# Altium PCB EVB_CBDM_AK376xE_V1.0.1.PcbDoc (part 2 of 2)
Units mil, origin at the board's own origin, x right, y up, seen from the top; angles counter-clockwise.
Board outline 1970 x 2130.01 mil, 4 copper layers (Top, Inner Layer 2, Inner Layer 3, Bottom), stack 35.4 mil thick; 161 components, 161 nets, 664 pads, 636 vias.
Unrouted connection lines stored in the file: 412.
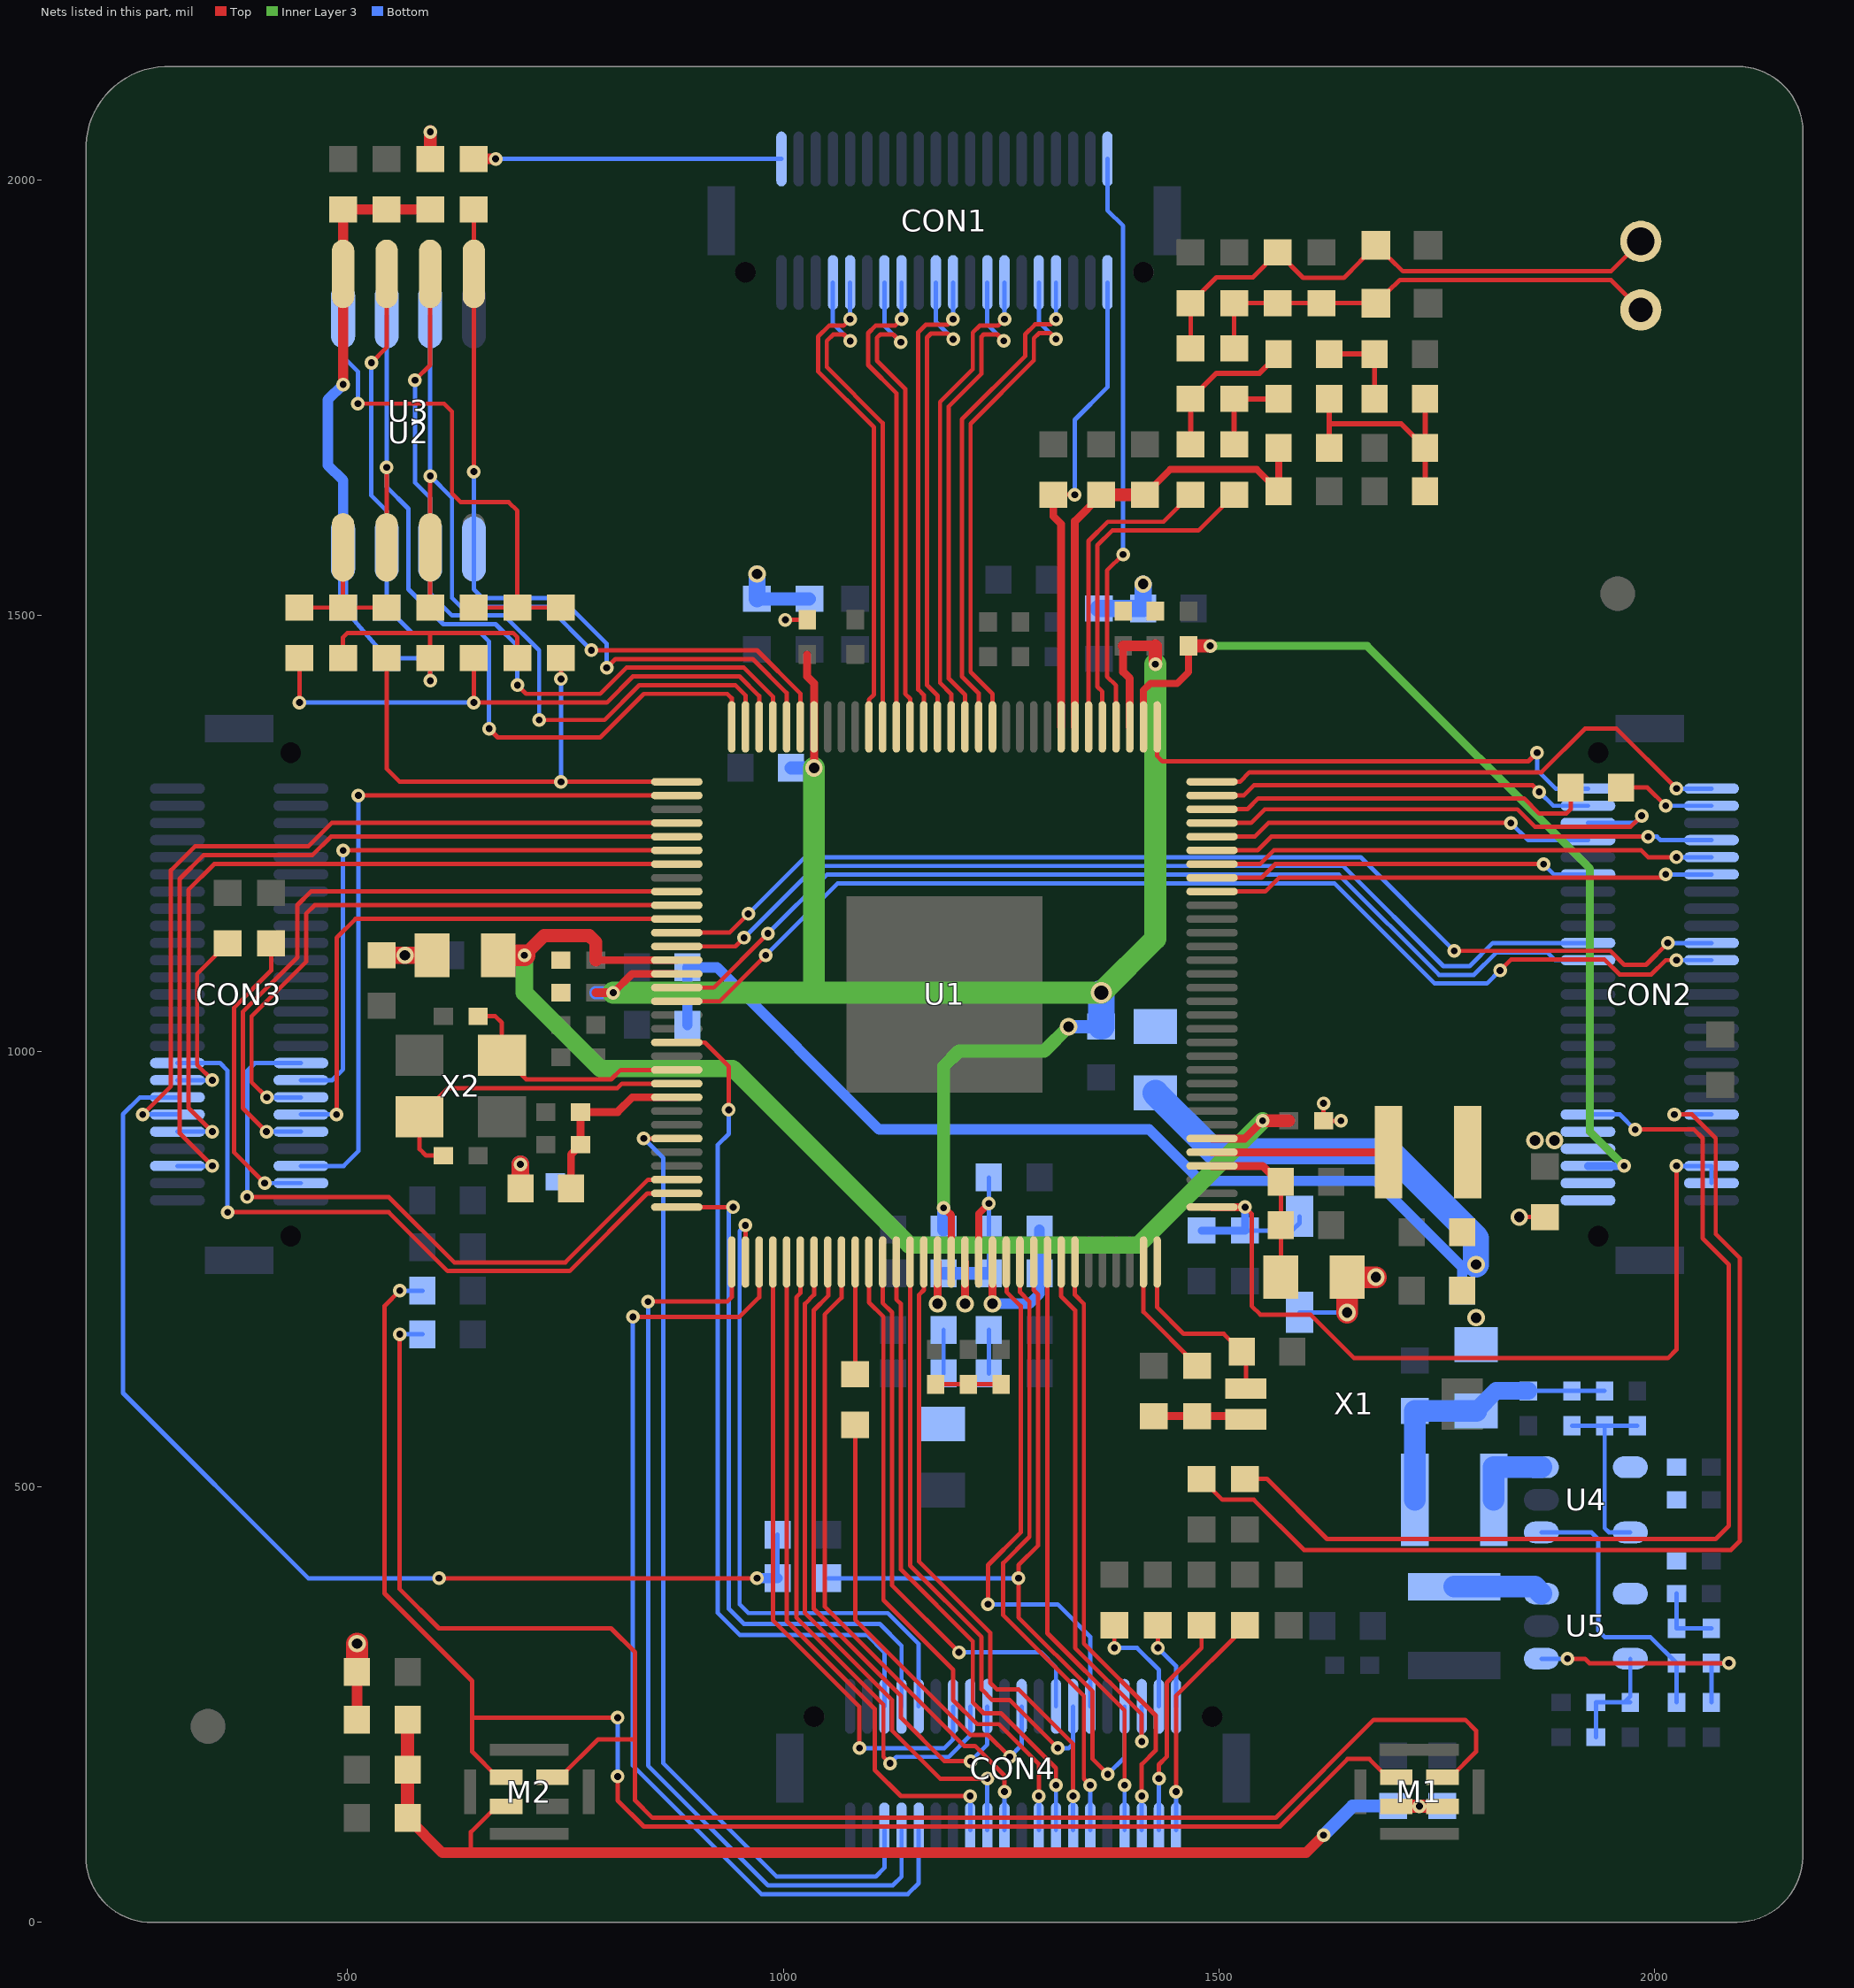
[diagram p4: the nets of this part, all layers, seen from the top]

## Via types
v1: diameter 15.75, hole 7.87, Top to Bottom, 582 vias
v2: diameter 20, hole 12, Top to Bottom, 53 vias
v3: diameter 24, hole 16, Top to Bottom, 1 vias

## Nets (pads, with @x,y where several pads share a name; then routed paths per layer and width w, separated by ;. In a path a pad name is that pad's centre, name@x,y a point inside that pad or via, vN(x,y) a via of type N, cw(c..) or ccw(c..) an arc to the next point about the centre after c; other vN are vias at no path point) (continued)
JTAG_TDO: CON4.5 U1.27 | length 1119.6
  Top w5: v1(840,899.65) U1.27@877.91,899.65
  Bottom w5: v1(840,899.65) 862.5,877.15 862.5,182.5 992.5,52.5 1106.1,52.5 1116.1,62.5 CON4.5@1116.1,106.14
JTAG_TMS: CON4.6 U1.20 | length 975.5
  Top w5: U1.20@877.91,1009.88 910.12,1009.88 937.5,982.5 v1(937.5,932.5)
  Bottom w5: v1(937.5,932.5) 937.5,905 925,892.5 925,355 950,330 1096.1,330 1116.1,310 CON4.6@1116.1,247.88
KEY_AIN0: CON1.1 U1.100 | length 671.2
  Top w5: U1.100@1381.85,1372.09 1381.85,1419.5 1371.5,1429.85 1371.5,1551.5 v1(1390,1570)
  Bottom w5: CON1.1@1372.01,2023.86 1372.01,1965 1390,1947.01 v1(1390,1570)
LCD_BL: CON3.34 U1.30 | length 773.5
  Top w5: v1(385,832.5) 547.5,832.5 622.5,757.5 750,757.5 844.9,852.4 U1.30@877.91,852.4
  Bottom w5: v1(385,832.5) 385,977.5 393.76,986.26 CON3.34@446.62,986.26
LCD_PWR: CON3.40 U1.11 | length 643
  Top w5: v1(487.5,927.2) 487.5,1130 509.11,1151.61 U1.11@877.91,1151.61
  Bottom w5: CON3.40@446.62,927.2 v1(487.5,927.2)
LCD_RST: CON3.33 U1.31 | length 804
  Top w5: v1(362.5,815) 547.5,815 615,747.5 755,747.5 844.15,836.65 U1.31@877.91,836.65
  Bottom w5: CON3.33@304.88,986.26 353.74,986.26 362.5,977.5 v1(362.5,815)
LED_CON: CON3.36 U1.6 | length 687.8
  Top w5: v1(495,1230.35) U1.6@877.91,1230.35
  Bottom w5: CON3.36@446.62,966.57 482.5,966.57 495,979.07 v1(495,1230.35)
LED_STATE: CON3.46 U1.2 | length 846.6
  Top w5: v1(512.5,1293.35) U1.2@877.91,1293.35
  Bottom w5: CON3.46@446.62,868.15 495.65,868.15 512.5,885 v1(512.5,1293.35)
MIC_N: C19.1 U1.102 | length 352.4
  Top w5: U1.102@1350.35,1372.09 1350.35,1585.35 1372.5,1607.5 1436.5,1607.5 C19.1@1467.5,1638.5
MIC_P: C16.1 U1.101 | length 391.8
  Top w5: U1.101@1366.1,1372.09 1366.1,1412.5 1360.5,1418.1 1360.5,1580.5 1377.5,1597.5 1476.5,1597.5 C16.1@1517.5,1638.5
MIPI_DSI_TXDN0: CON1.8 U1.110 | length 573.3
  Top w5: U1.110@1224.37,1372.09 1224.37,1410.63 1205,1430 1205,1725 1277.5,1797.5 1277.5,1822.5 1289,1834 1306.95,1834 v1(1312.95,1840)
  Bottom w5: v1(1312.95,1840) CON1.8@1312.95,1882.12
MIPI_DSI_TXDN1: CON1.14 U1.112 | length 558.3
  Top w5: U1.112@1192.87,1372.09 1192.87,1409.63 1180,1422.5 1180,1745 1217.5,1782.5 1217.5,1824.63 1225.37,1832.5 1246.4,1832.5 v1(1253.9,1840)
  Bottom w5: v1(1253.9,1840) CON1.14@1253.9,1882.12
MIPI_DSI_TXDN2: CON1.20 U1.114 | length 543.7
  Top w5: U1.114@1161.38,1372.09 1161.38,1408.62 1155,1415 1155,1825 1163.5,1833.5 1188.34,1833.5 v1(1194.84,1840)
  Bottom w5: v1(1194.84,1840) CON1.20@1194.84,1882.12
MIPI_DSI_TXDN3: CON1.26 U1.116 | length 552.4
  Top w5: U1.116@1129.88,1372.09 1129.88,1404.38 1129.88,1755.12 1097.5,1787.5 1097.5,1824 1106,1832.5 1128.29,1832.5 v1(1135.79,1840)
  Bottom w5: v1(1135.79,1840) CON1.26@1135.79,1882.12
MIPI_DSI_TXDN4: CON1.32 U1.118 | length 563.9
  Top w5: v1(1076.73,1840) 1069.23,1832.5 1052.5,1832.5 1040,1820 1040,1780 1104,1716 1104,1409 1098.39,1403.39 U1.118@1098.39,1372.09
  Bottom w5: v1(1076.73,1840) CON1.32@1076.73,1882.12
MIPI_DSI_TXDP0: CON1.10 U1.109 | length 590.1
  Top w5: U1.109@1240.12,1372.09 1240.12,1407.5 1240.12,1410 1215,1435.12 1215,1720 1287.62,1792.62 1287.62,1818 1293.62,1824 1306.27,1824 v1(1313,1817.27)
  Bottom w5: CON1.10@1293.27,1882.12 1293.27,1837 v1(1313,1817.27)
MIPI_DSI_TXDP1: CON1.16 U1.111 | length 575.4
  Top w5: U1.111@1208.62,1372.09 1208.62,1406.38 1208.62,1408.88 1190,1427.5 1190,1740 1227.5,1777.5 1227.5,1820 1230,1822.5 1245.71,1822.5 v1(1253,1815.21)
  Bottom w5: CON1.16@1234.21,1882.12 1234.21,1834 v1(1253,1815.21)
MIPI_DSI_TXDP2: CON1.22 U1.113 | length 559.8
  Top w5: U1.113@1177.13,1372.09 1177.13,1405.37 1177.13,1407.87 1165,1420 1165,1819 1169.5,1823.5 1188.5,1823.5 v1(1195,1817)
  Bottom w5: CON1.22@1175.16,1882.12 1175.16,1837 1195,1817.16 v1(1195,1817)
MIPI_DSI_TXDP3: CON1.28 U1.115 | length 571.4
  Top w5: v1(1135,1813.6) 1126.1,1822.5 1111.5,1822.5 1107.5,1818.5 1107.5,1792.5 1140,1760 1140,1410 1145.63,1404.37 U1.115@1145.63,1372.09
  Bottom w5: CON1.28@1116.1,1882.12 1116.1,1832.5 v1(1135,1813.6)
MIPI_DSI_TXDP4: CON1.34 U1.117 | length 578.1
  Top w5: v1(1077,1815) 1069.5,1822.5 1057.5,1822.5 1050,1815 1050,1785 1114.13,1720.87 U1.117@1114.13,1372.09
  Bottom w5: CON1.34@1057.05,1882.12 1057.05,1834.95 v1(1077,1815)
NETC9_1: C9.1 C10.1 C11.1 C12.1 FB3.2 M1.1 M1.2 M2.1 | length 1411.8
  Top w5: 641.73,80 641.73,103.73 671.27,133.27 M2.1@682.15,133.27
  Top w12: C11.1@569,120 609,80 641.73,80 1600,80 v1(1620,100)
  Top w15: C11.1@569,120 C12.1@569,175 FB3.2@569,232.5 ; M1.1@1703.43,133.27 v1(1730,133.27) M1.2@1756.57,133.27
  Bottom w15: v1(1620,100) 1653.5,133.5 C10.1@1700,133.5
NETC14_1: C14.1 C15.1 C17.1 R5.1 R6.2 | length 283.4
  Top w6: R5.1@1626.5,1692.5 1626.5,1720 ; R6.2@1626.5,1748.5 1626.5,1720 ; C14.1@1736.5,1642.5 C15.1@1736.5,1692.5 ; C17.1@1736.5,1748.5 C15.1@1736.5,1692.5 ; 1626.5,1720 1709,1720 C15.1@1736.5,1692.5
NETC16_2: C16.2 FB4.1 R6.1 | length 103
  Top w6: C16.2@1517.5,1696.5 FB4.1@1517.5,1748.5 R6.1@1568.5,1748.5
NETC17_2: C17.2 R7.1 R8.2 | length 103.5
  Top w6: R7.1@1626.5,1800 R8.2@1678.5,1800 C17.2@1678.5,1748.5
NETC18_1: C18.1 C20.1 C22.1 E1.1 FB4.2 MIC1.1 | length 543.5
  Top w5: FB4.2@1517.5,1806.5 C20.1@1517.5,1858.5 C18.1@1567.5,1858.5 C22.1@1617.5,1858.5 E1.1@1680,1858.5 1707.5,1885 1949.69,1885 MIC1.1@1984.06,1850.63
NETC18_2: C18.2 C21.1 E2.1 FB5.2 MIC1.2 | length 646.8
  Top w5: FB5.2@1467.5,1806.5 C21.1@1467.5,1858.5 1497,1888 1539,1888 C18.2@1567.5,1916.5 1596.5,1887.5 1643.5,1887.5 E2.1@1680,1925 1711,1895 1949.69,1895 MIC1.2@1984.06,1929.37
NETC19_2: C19.2 FB5.1 R7.2 | length 174.3
  Top w6: C19.2@1467.5,1696.5 FB5.1@1467.5,1748.5 1497,1778 1546.5,1778 R7.2@1568.5,1800
NETC48_2: C48.2 R41.1 R42.2 U4.5 | length 223.9
  Bottom w5: C48.2@1905,570 R41.1@1942.5,570 ; U4.5@1971.97,447.6 1947.5,447.6 1942.5,452.6 R41.1@1942.5,570 ; R42.2@1980,570 R41.1@1942.5,570
NETC69_1: C69.1 R37.1 X1.2 | length 107.5
  Top w9: C69.1@1425,581 R37.1@1475,581 1527.26,581 X1.2@1530.98,577.28
NETC73_1: C73.1 R40.1 U4.1 | length 323.7
  Bottom w5: U4.1@1870,447.6 1927.4,447.6 1935,440 1935,335 1942.5,327.5 1995,327.5 R40.1@2025,297.5 C73.1@2025,252.5
NETC76_2: C76.2 R45.1 R46.2 U5.5 | length 139.4
  Bottom w5: R45.1@1932.5,212.5 C76.2@1932.5,252.5 R46.2@1971.97,252.5 1965,252.5 1971.97,259.47 U5.5@1971.97,302.6
NETC79_1: C79.1 R44.1 U5.1 | length 282.1
  Top w5: v1(1900,302.6) 1919.9,302.6 1925,297.5 v1(2085,297.5)
  Bottom w5: U5.1@1870,302.6 v1(1900,302.6) ; C79.1@2065,252.5 R44.1@2065,297.5 v1(2085,297.5)
NETCON1_39: CON1.39 R4.1 | length 353
  Top w12: R4.1@645,2024 v1(670,2024)
  Bottom w5: v1(670,2024) CON1.39@997.99,2023.86
NETCON2_47: CON2.47 R15.1 | length 112.3
  Top w5: R15.1@1961.5,1302.5 1991.54,1302.5 v1(2012.5,1281.54)
  Bottom w5: v1(2012.5,1281.54) CON2.47@2065.12,1281.54
NETCON3_35: CON3.35 R26.1 | length 218.8
  Top w5: v1(345,966.57) 327.5,984.07 327.5,1088.5 R26.1@362.5,1123.5
  Bottom w5: CON3.35@304.88,966.57 v1(345,966.57)
NETCON3_48: CON3.48 R25.1 | length 348.8
  Top w5: v1(405,848.46) 370,883.46 370,1050 412.5,1092.5 R25.1@412.5,1123.5
  Bottom w5: v1(405,848.46) CON3.48@446.62,848.46
NETL1_1: L1.1 U4.3 | length 92.1
  Bottom w25: L1.1@1815.28,485 1815.28,522.4 U4.3@1870,522.4
NETL3_1: L3.1 U5.3 | length 103.3
  Bottom w25: L3.1@1770,385.28 1862.12,385.28 U5.3@1870,377.4
NETR2_2: R2.2 R29.1 R30.1 U2.1 | length 607.9
  Top w5: v1(512,1743) 611,1743 620,1734 620,1640 630,1630 685,1630 695,1620 R2.2@695,1509 ; R30.1@645,1509 R2.2@695,1509 ; R29.1@745,1509 R2.2@695,1509
  Bottom w5: U2.1@495,1843.86 495,1797 512,1780 v1(512,1743)
NETR9_1: R9.1 U1.42 | length 128.9
  Top w5: R9.1@1082.64,629 U1.42@1082.64,757.91
NETR19_2: R19.2 R31.1 R32.1 U3.1 | length 169
  Top w5: R31.1@445,1509 R19.2@495,1509 ; U3.1@495,1578 R19.2@495,1509 ; R32.1@545,1509 R19.2@495,1509
PDM_CLK: M1.3 M2.3 R20.1 | length 2000.8
  Top w5: v1(560,675) 560,382.5 605,337.5 802.5,337.5 830,310 830,210 ; M2.3@735.29,166.73 736.06,167.5 745,167.5 787.5,210 830,210 ; M1.3@1756.57,166.73 1765.73,166.73 1795,196 1795,220 1782.5,232.5 1677.5,232.5 1565,120 850,120 830,140 830,210
  Bottom w5: v1(560,675) R20.1@586,675
PDM_DATA: M1.4 M2.4 R28.1 | length 1863.7
  Top w5: v1(560,725) 542.5,707.5 542.5,377.5 643,277 643,235 ; M2.4@682.15,166.73 672.27,166.73 643,196 643,235 ; v1(810,167.5) 810,140 840,110 1570,110 1647.5,187.5 1672.5,187.5 1693.27,166.73 M1.4@1703.43,166.73 ; v1(810,235) 643,235
  Bottom w5: v1(560,725) R28.1@586,725 ; v1(810,167.5) v1(810,235)
RMII0_50MCLK: CON4.22 R9.2 | length 529.7
  Top w5: R9.2@1082.64,571 1082.64,347.36 1215,215 1235,215 v1(1260,190)
  Bottom w5: v1(1260,190) 1273.58,203.58 CON4.22@1273.58,247.88
RMII0_MDC: CON4.15 U1.37 | length 785.6
  Top w5: U1.37@1003.9,757.91 1003.9,346.1 1105,245 1105,175 1135,145 v1(1214.53,145)
  Bottom w5: CON4.15@1214.53,106.14 v1(1214.53,145)
RMII0_MDIO: CON4.14 U1.36 | length 748.5
  Top w5: U1.36@988.15,757.91 988.15,346.85 1087.5,247.5 v1(1087.5,200)
  Bottom w5: v1(1087.5,200) 1185,200 1194.84,209.84 CON4.14@1194.84,247.88
RMII0_RST: CON2.11 R21.1 | length 1230.7
  Top w5: R21.1@1480,509 1504,485 1540,485 1597.5,427.5 2087.5,427.5 2097.5,437.5 2097.5,762.5 2070,790 2070,900 2042.8,927.2 v1(2022.5,927.2)
  Bottom w5: v1(2022.5,927.2) CON2.11@2065.12,927.2
RMII0_RXD0: CON4.18 U1.40 | length 743
  Top w5: U1.40@1051.14,757.91 1051.65,757.4 1051.65,719.15 1035,702.5 1035,360 1135,260 1135,235 1185,185 v1(1215,185)
  Bottom w5: v1(1215,185) 1234.21,204.21 CON4.18@1234.21,247.88
RMII0_RXD1: CON4.19 U1.41 | length 752.6
  Top w5: U1.41@1066.89,757.91 1066.89,716.89 1047.5,697.5 1047.5,362.5 1207.5,202.5 1220,202.5 1253.9,168.6 v1(1253.9,150)
  Bottom w5: CON4.19@1253.9,106.14 v1(1253.9,150)
RMII0_RXDV: CON4.17 U1.39 | length 774.5
  Top w5: U1.39@1035.39,757.91 1035.39,720.39 1025,710 1025,355 1125,255 1125,220 1180,165 v1(1234.21,165)
  Bottom w5: CON4.17@1234.21,106.14 v1(1234.21,165)
RMII0_RXER: CON4.16 U1.38 | length 760.5
  Top w5: U1.38@1019.65,757.91 1019.65,722.15 1015,717.5 1015,350 1115,250 1115,190 v1(1122.5,182.5)
  Bottom w5: v1(1122.5,182.5) 1130,190 1190,190 1214.53,214.53 CON4.16@1214.53,247.88
RMII0_TXD0: CON4.23 U1.43 | length 747.1
  Top w5: U1.43@1098.39,757.91 1098.39,711.61 1115,695 1115,370 1195,290 1195,255 1222.5,227.5 1247.5,227.5 1293.27,181.73 v1(1293.27,145)
  Bottom w5: CON4.23@1293.27,106.14 v1(1293.27,145)
RMII0_TXD1: CON4.26 U1.44 | length 647.4
  Top w5: U1.44@1114.13,757.91 1114.13,710.87 1125,700 1125,386.63 v1(1201.63,310)
  Bottom w5: v1(1201.63,310) 1295.45,310 1312.95,292.5 CON4.26@1312.95,247.88
RMII0_TXEN: CON4.25 U1.45 | length 739.3
  Top w5: U1.45@1129.88,757.91 1129.88,715.12 1135,710 1135,405.12 1217.5,322.62 1217.5,252.5 1230,240 1250,240 1312.95,177.05 v1(1312.95,157.5)
  Bottom w5: CON4.25@1312.95,106.14 v1(1312.95,157.5)
RMII1_50MCLK/CSI0_D4: R15.2 U1.94 | length 450.9
  Top w5: U1.94@1492.09,1277.6 1532.6,1277.6 1545,1290 1850,1290 1867.5,1272.5 1898.5,1272.5 1903.5,1277.5 R15.2@1903.5,1302.5
RMII1_MDC/CSI0_VSYNC/SD2_D0: CON2.40 U1.89 | length 442.7
  Top w5: U1.89@1492.09,1198.86 1548.86,1198.86 1564.61,1214.61 v1(1872.5,1214.61)
  Bottom w5: v1(1872.5,1214.61) 1884.31,1202.8 CON2.40@1923.38,1202.8
RMII1_MDIO/CSI0_HSYNC/SD2_D1: CON2.39 U1.88 | length 581.2
  Top w5: U1.88@1492.09,1183.11 1553.11,1183.11 1568.86,1198.86 2008.56,1198.86 v1(2012.5,1202.8)
  Bottom w5: v1(2012.5,1202.8) CON2.39@2065.12,1202.8
RMII1_RST: CON2.12 R23.1 | length 1190.1
  Top w5: R23.1@1530,509 1555,509 1624,440 2070,440 2085,455 2085,755 2055,785 2055,900 2045,910 v1(1977.5,910)
  Bottom w5: CON2.12@1923.38,927.2 1960,927.2 1977.2,910 v1(1977.5,910)
RMII1_RXD0/CSI0_D2/SD2_D3: CON2.44 U1.92 | length 446
  Top w5: U1.92@1492.09,1246.1 1541.1,1246.1 1556.85,1261.85 v1(1835,1261.85)
  Bottom w5: v1(1835,1261.85) 1854.69,1242.17 CON2.44@1923.38,1242.17
RMII1_RXD1/CSI0_D3/SD2_D2: CON2.46 U1.93 | length 577.8
  Top w5: U1.93@1492.09,1261.85 1536.85,1261.85 1552.5,1277.5 1842.5,1277.5 1862.5,1257.5 1972.5,1257.5 v1(1985,1270)
  Bottom w5: CON2.46@1923.38,1261.85 1976.85,1261.85 v1(1985,1270)
RMII1_RXDV/CSI0_D1/SD2_CMD: CON2.43 U1.91 | length 581.2
  Top w5: U1.91@1492.09,1230.35 1544.28,1230.35 1560,1246.07 v1(1992.5,1246.07)
  Bottom w5: v1(1992.5,1246.07) 2002.5,1246.07 2006.41,1242.17 CON2.43@2065.12,1242.17
RMII1_RXER/CSI0_D0/SD2_CLK: CON2.41 U1.90 | length 582.8
  Top w5: U1.90@1492.09,1214.61 1547.11,1214.61 1562.85,1230.35 1984.65,1230.35 1992.43,1222.57 2002.5,1222.48 v1(2025,1222.48)
  Bottom w5: v1(2025,1222.48) CON2.41@2065.12,1222.48
RMII1_TXD0/CSI0_D5: CON2.48 U1.95 | length 445.8
  Top w5: U1.95@1492.09,1293.35 1528.35,1293.35 1540,1305 1860,1305 v1(1867.5,1297.5)
  Bottom w5: v1(1867.5,1297.5) 1883.46,1281.54 CON2.48@1923.38,1281.54
RMII1_TXD1/CSI0_D6: CON2.49 U1.96 | length 626.8
  Top w5: U1.96@1492.09,1309.09 1524.09,1309.09 1535,1320 1870,1320 1920,1370 1956.22,1370 v1(2025,1301.22)
  Bottom w5: v1(2025,1301.22) CON2.49@2065.12,1301.22
RMII1_TXEN/CSI0_D7: CON2.50 U1.97 | length 563.4
  Top w5: U1.97@1429.09,1372.09 1429.09,1338.41 1435,1332.5 1855,1332.5 v1(1865,1342.5)
  Bottom w5: v1(1865,1342.5) 1865,1322.5 1886.24,1301.26 CON2.50@1923.38,1301.22
SPI0_CS0: R30.2 R31.2 U1.126 | length 686.6
  Top w5: v1(445,1400) R31.2@445,1451 ; R30.2@645,1451 v1(645,1400) 797.5,1400 827.5,1430 950,1430 972.4,1407.6 U1.126@972.4,1372.09
  Bottom w5: v1(445,1400) v1(645,1400)
SPI0_CS1: R29.2 R32.2 U1.1 | length 608.1
  Top w5: R32.2@545,1451 545,1324.09 560,1309.09 v1@745,1309.09 ; v1(745,1309) v1@745,1309.09 ; v1(745,1427) R29.2@745,1451 ; U1.1@877.91,1309.09 v1@745,1309.09
  Bottom w5: v1(745,1309) v1(745,1427)
SPI0_DIN: U1.125 U2.2 U3.2 | length 971.4
  Top w5: U3.2@545,1578 v1(545,1670) ; v1(695,1420) 705,1410 790,1410 820,1440 955,1440 988.15,1406.85 U1.125@988.15,1372.09
  Bottom w5: U2.2@545,1843.86 v1(545,1670) 545,1647.5 570,1622.5 570,1530 610,1490 670,1490 695,1465 v1(695,1420)
SPI0_DOUT: R4.2 U1.124 U2.5 U3.5 | length 907.6
  Top w5: v1(645,1665) U3.5@645,1892 R4.2@645,1966 ; v1(797.5,1440) 807.5,1450 965,1450 1003.9,1411.1 U1.124@1003.9,1372.09
  Bottom w5: v1(645,1665) U2.5@645,1576.14 645,1530 655,1520 745,1520 797.5,1467.5 v1(797.5,1440)
SPI0_HOLD: R3.2 U1.128 U2.7 U3.7 | length 969.4
  Top w5: v1(527.5,1790) 545,1807.5 U3.7@545,1892 ; v1(662.5,1370) 672.5,1360 790,1360 840,1410 935.91,1410 940.91,1405 U1.128@940.91,1372.09
  Bottom w5: v1(527.5,1790) 527.5,1637.5 545,1620 U2.7@545,1576.14 R3.2@545,1509 574,1480 652.5,1480 662.5,1470 v1(662.5,1370)
SPI0_SCLK: U1.127 U2.6 U3.6 | length 907.7
  Top w5: v1(577.5,1770) 595,1787.5 U3.6@595,1892 ; v1(720,1380) 795,1380 835,1420 945,1420 956.65,1408.35 U1.127@956.65,1372.09
  Bottom w5: v1(577.5,1770) 577.5,1652.5 595,1635 U2.6@595,1576.14 595,1525 620,1500 680,1500 720,1460 v1(720,1380)
SPI0_WP: R1.2 U1.123 U2.3 U3.3 | length 968.5
  Top w5: R1.2@595,1509 U3.3@595,1578 v1(595,1660) ; v1(780,1460) 970,1460 1019.65,1410.35 U1.123@1019.65,1372.09
  Bottom w5: U2.3@595,1843.86 v1(595,1660) 620,1635 620,1520 630,1510 730,1510 v1(780,1460)
SPI_FLASH_3V3: C1.1 C2.2 C70.1 FB1.1 R1.1 R2.1 R3.1 R19.1 U2.8 U3.8 | length 1025.4
  Top w5: R19.1@495,1451 495,1475 500,1480 595,1480 ; v1(595,1425) R1.1@595,1451 595,1480 ; R2.1@695,1451 695,1475 690,1480 595,1480
  Top w12: v1(495,1765) U3.8@495,1892 C70.1@495,1966 C1.1@545,1966 FB1.1@595,1966
  Bottom w5: C2.2@495,1509 R3.1@545,1451 585,1451 595,1441 v1(595,1425)
  Bottom w12: C2.2@495,1509 U2.8@495,1576.14 495,1655 477.5,1672.5 477.5,1747.5 v1(495,1765)
SPK_EN: CON3.45 U1.5 | length 975.5
  Top w5: v1(345,868.15) 307.5,905.65 307.5,1197.5 335,1225 460,1225 481.1,1246.1 U1.5@877.91,1246.1
  Bottom w5: CON3.45@304.88,868.15 v1(345,868.15)
SW11: L2.1 U1.69 | length 202.6
  Top w9: U1.69@1492.09,883.9 1556.1,883.9 1607.22,883.9 L2.1@1694.72,883.9
TF_CLK: CON4.34 R17.2 U1.55 | length 946.1
  Top w5: U1.55@1287.36,757.91 1287.36,725.64 1292.5,720.5 1292.5,432.5 1270,410 v1(1270,395) 1270,350 1355,265 1355,187.5 v1(1372.5,170)
  Bottom w5: R17.2@1051.5,395 v1(1270,395) ; v1(1372.5,170) 1391.69,189.19 CON4.34@1391.69,247.88
TF_CMD: CON4.33 U1.56 | length 688.5
  Top w5: U1.56@1303.11,757.91 1303.11,331.89 1391.69,243.31 v1(1391.69,157.5)
  Bottom w5: CON4.33@1391.69,106.14 v1(1391.69,157.5)
TF_D0: CON4.29 U1.54 | length 710.1
  Top w5: U1.54@1271.61,757.91 1271.61,723.39 1282.5,712.5 1282.5,442.5 1252.5,412.5 1252.5,352.5 1345,260 1345,164.82 v1(1352.32,157.5)
  Bottom w5: CON4.29@1352.32,106.14 v1(1352.32,157.5)
TF_D1: CON4.30 U1.53 | length 627.9
  Top w5: v1(1235,365) 1235,410 1272.5,447.5 1272.5,707.5 1256.25,723.75 1256.25,757.53 U1.53@1255.87,757.91
  Bottom w5: v1(1235,365) 1315,365 1352.32,327.68 CON4.30@1352.32,247.88
TF_D2: CON4.35 U1.58 | length 696.9
  Top w5: U1.58@1334.61,757.91 1334.61,720.39 1345,710 1345,320 1427.5,237.5 1427.5,197.5 1411.38,181.38 v1(1411.38,145)
  Bottom w5: CON4.35@1411.38,106.14 1411.38,110 v1(1411.38,145)
TF_D3: CON4.36 U1.57 | length 629.1
  Top w5: U1.57@1318.86,757.91 1318.86,718.64 1335,702.5 1335,315 1411.38,238.62 v1(1411.38,207.5)
  Bottom w5: v1(1411.38,207.5) CON4.36@1411.38,247.88
TF_DET: CON3.37 R17.1 R18.1 | length 1279.4
  Top w5: v1(605,395) v1(970,395)
  Bottom w5: CON3.37@304.88,946.89 261.89,946.89 242.5,927.5 242.5,607.5 455,395 v1(605,395) ; R17.1@993.5,395 R18.1@993.5,445
  Bottom w12: v1(970,395) R17.1@993.5,395
TF_EN: CON3.39 U1.4 | length 936.6
  Top w5: v1(265,927.2) 297.5,959.7 297.5,1207.5 325,1235 455,1235 481.85,1261.85 U1.4@877.91,1261.85
  Bottom w5: v1(265,927.2) CON3.39@304.88,927.2
TS_INT: CON2.32 U1.13 | length 1142.4
  Top w5: U1.13@877.91,1120.12 945.12,1120.12 v1(955,1130)
  Bottom w5: v1(955,1130) 1037.5,1212.5 1642.5,1212.5 1757.5,1097.5 1787.5,1097.5 1814.06,1124.06 CON2.32@1923.38,1124.06
TS_RST: CON2.31 U1.12 | length 1284.6
  Top w5: U1.12@877.91,1135.87 938.37,1135.87 v1(960,1157.5) ; v1(1770,1115) 1949.06,1115 1965,1099.06 1990,1099.06 v1(2015,1124.06)
  Bottom w5: v1(960,1157.5) 1025,1222.5 1662.5,1222.5 v1(1770,1115) ; v1(2015,1124.06) CON2.31@2065.12,1124.06
TS_SCL: CON2.30 U1.16 | length 1160.9
  Top w5: U1.16@877.91,1072.87 920.37,1072.87 v1(982.5,1135)
  Bottom w5: v1(982.5,1135) 1050,1202.5 1637.5,1202.5 1752.5,1087.5 1792.5,1087.5 1818,1113 1877,1113 1885.63,1104.37 CON2.30@1923.38,1104.37
TS_SDA: CON2.29 U1.17 | length 1316.1
  Top w5: U1.17@877.91,1057.13 927.13,1057.13 v1(980,1110) ; v1(1822.5,1092.5) 1835,1105 1942.5,1105 1959.5,1088 1996.13,1088 2012.5,1104.37 v1(2025,1104.37)
  Bottom w5: v1(980,1110) 1062.5,1192.5 1632.5,1192.5 1747.5,1077.5 1807.5,1077.5 v1(1822.5,1092.5) ; v1(2025,1104.37) CON2.29@2065.12,1104.37
UART0_RXD: CON4.27 U1.47 | length 741.8
  Top w5: U1.47@1161.38,757.91 1161.38,725.88 1156,720.5 1156,414 1237.5,332.5 1237.5,275 1245,267.5 1270,267.5 1332.64,204.86 v1(1332.64,145)
  Bottom w5: CON4.27@1332.64,106.14 v1(1332.64,145)
UART0_TXD: CON4.28 U1.46 | length 702.4
  Top w5: U1.46@1145.63,757.91 1145.63,409.37 1227.5,327.5 1227.5,267.5 1240,255 1260,255 v1(1315,200)
  Bottom w5: v1(1315,200) 1327.64,200 1332.64,205 CON4.28@1332.64,247.88
UART1_CTS/SPI2_DIN: CON4.10 U1.34 | length 775.8
  Top w5: U1.34@956.65,757.91 v1(956.65,800)
  Bottom w5: v1(956.65,800) 950,793.35 950,365 960,355 1120,355 1155.47,319.53 CON4.10@1155.47,247.88
UART1_RTS/SPI2_DOUT: CON4.9 U1.35 | length 1165.1
  Top w5: v1(827.5,695) 950,695 972.4,717.4 U1.35@972.4,757.91
  Bottom w5: v1(827.5,695) 827.5,180 975,32.5 1142.97,32.5 1155.47,45 CON4.9@1155.47,106.14
UART1_RXD/SPI2_CS0: CON4.8 U1.32 | length 813.1
  Top w5: U1.32@877.91,820.91 v1(942.5,820.91)
  Bottom w5: v1(942.5,820.91) 937.5,815.91 937.5,360 955,342.5 1110.79,342.5 1135.79,317.5 CON4.8@1135.79,247.88
UART1_TXD/SPI2_CLK: CON4.7 U1.33 | length 1076.4
  Top w5: v1(845,712.5) 935.91,712.5 940.91,717.5 U1.33@940.91,757.91
  Bottom w5: v1(845,712.5) 845,180 982.5,42.5 1125.79,42.5 1135.79,52.5 CON4.7@1135.79,106.14
UART2_RXD: CON4.38 R33.1 | length 129.5
  Top w5: v1(1380,315) R33.1@1380,341
  Bottom w5: v1(1380,315) 1406.06,315 1431.06,290 CON4.38@1431.06,247.88
UART2_TXD: CON4.40 R35.1 | length 101.7
  Top w5: v1(1430,315) R35.1@1430,341
  Bottom w5: v1(1430,315) 1450.75,294.25 CON4.40@1450.75,247.88
UART3_RXD: CON4.37 R22.1 | length 255.1
  Top w5: v1(1431.06,165) 1431.06,181.06 1440,190 1440,275 1480,315 R22.1@1480,341
  Bottom w5: CON4.37@1431.06,106.14 v1(1431.06,165)
UART3_TXD: CON4.39 R24.1 | length 267.7
  Top w5: v1(1450.75,150) 1450.75,260 1530,339.25 R24.1@1530,341
  Bottom w5: CON4.39@1450.75,106.14 v1(1450.75,150)
VCC_3V6: C49.1 C71.1 C77.1 C78.1 CON2.2 CON2.4 R40.2 R44.2 U4.4 U5.4 | length 79.9
  Bottom w5: C78.1@2025,377.4 R40.2@2025,337.5 R44.2@2065,337.5
VCC_RTC: C51.1 C52.1 CON2.3 CON2.5 D1.K U1.65 | length 1092
  Top w5: v1(1530,820.91) 1537.5,813.41 1537.5,707.5 1547.5,697.5 1605,697.5 1655,647.5 2015,647.5 2025,657.5 v1(2025,868.15)
  Top w9: U1.65@1492.09,820.91 v1(1530,820.91)
  Bottom w5: C52.1@1530,794 1584,794 1592.5,802.5 D1.K@1592.5,810.24 ; v1(2025,868.15) CON2.5@2065.12,868.15 2065.12,850 CON2.3@2065.12,848.46
  Bottom w9: C51.1@1480,794 C52.1@1530,794 v1(1530,820.91)
VCM3: C13.1 C65.1 C66.1 R5.2 U1.103 | length 554.9
  Top w8: C66.1@1415,1638.5 1444,1667.5 1543.5,1667.5 C13.1@1568.5,1642.5 R5.2@1568.5,1692.5
  Top w9: U1.103@1334.61,1372.09 1334.61,1608.11 C65.1@1365,1638.5
  Top w15: C65.1@1365,1638.5 C66.1@1415,1638.5
VCM_RESET: C50.1 CON1.2 U1.104 | length 553.7
  Top w5: C50.1@1310,1638.5 v1(1334.5,1638.5)
  Top w9: C50.1@1310,1638.5 1310,1613.86 1318.86,1605 U1.104@1318.86,1372.09
  Bottom w5: v1(1334.5,1638.5) 1334.5,1724.5 1372.01,1762.01 CON1.2@1372.01,1882.12
VDD: C44.1 C45.1 C48.1 L1.2 R39.2 R41.2 | length 329.3
  Bottom w5: C44.1@1855,610 C48.1@1905,610 R41.2@1942.5,610
  Bottom w20: R39.2@1795,587 1818,610 C44.1@1855,610
  Bottom w25: L1.2@1724.72,485 C45.1@1724.72,587 R39.2@1795,587
VDD_1V1: C36.2 C46.1 C47.1 C53.1 FB6.1 L2.2 R11.1 R39.1 | length 1591.7
  Bottom w12: FB6.1@890,1030 C53.1@890,1096 924,1096 1110,910 1420,910 1479,851 1680,851 1779,752 C47.1@1779,725
  Bottom w30: R11.1@1427,952 1494,885 1695,885 1795,785 v2(1795,755)
  other v2: 1795,694
VDD_1V8: C23.2 C24.2 C25.1 C26.2 C27.2 C28.1 C62.1 C81.1 R14.2 R43.1 U1.48 U1.50 U1.52 | length 450.9
  Top w5: C81.1@1175,617.5 C25.1@1212.5,617.5 C28.1@1250,617.5
  Top w9: v2(1177.13,710) U1.48@1177.13,757.91 ; v2(1208.62,710) U1.50@1208.62,757.91 ; v2(1240.12,710) U1.52@1240.12,757.91
  Bottom w5: C26.2@1184,630 C24.2@1184,680 ; C27.2@1236,630 C23.2@1236,680
  Bottom w12: v2(1240.12,710) 1282.5,710 1294,721.5 C62.1@1294,745 R14.2@1294,795
VDD_3V3: C5.1 C8.1 C40.2 C56.1 C59.1 C82.1 CON2.8 CON2.10 D1.A FB1.2 FB2.1 FB3.1 FB7.1 FB8.1 R12.1 R13.2 | length 551.7
  Top w5: v2(1844.5,809.5) C82.1@1874,809.5
  Top w12: FB3.1@511,232.5 C8.1@511,287.5
  Top w15: FB1.2@595,2024 v1(595,2055)
  Top w20: C59.1@539,1110 v2(566,1110) R12.1@597,1110 ; FB7.1@698.5,842.5 v1(698.5,870)
  Top w25: C8.1@511,287.5 v2(511,320) ; v2(1647,700) R13.2@1647,740.5 v2(1680,740.5)
  Bottom w5: D1.A@1592.5,700 1617.5,700 v2(1647,700) ; CON2.10@1923.38,907.52 CON2.10@1926,907.52
  Bottom w15: C40.2@970,1519 FB8.1@1030,1519
  Bottom w19.68: C40.2@970,1519 v2(970,1547.5)
  Bottom w20: 698.5,850 v1(698.5,870) ; FB2.1@1362,1508 C56.1@1413,1508 v2(1413,1536)
  other v2: 1862.5,897.5 1885,897.5
VDD_CPU: C29.2 C30.1 C31.1 C32.2 C33.1 C34.1 C35.2 C80.1 R11.2 U1.15 U1.49 U1.99 U1.122 | length 2173.7
  Top w5: v1(1002.5,1495) C80.1@1027.5,1495
  Top w8.5: v1(1184,820) 1192.87,812 U1.49@1192.87,757.91
  Top w9: v1(805,1067) 826.62,1088.62 U1.15@877.91,1088.62 ; 1027.5,1455 1027.5,1429.9 1035.39,1422.16 U1.122@1035.39,1372.09 v2(1035.39,1325) ; 1390,1465 1390,1435.2 1397.6,1427.6 U1.99@1397.6,1372.09
  Top w10: 785,1067 v1(805,1067)
  Top w12: 1390,1465 1427,1465
  Top w15: v1(1427,1444) 1427,1465
  Inner Layer 3 w15: v1(1184,820) 1184,982.5 1201.5,1000 1299.5,1000 v2(1327.5,1028)
  Inner Layer 3 w25: v1(805,1067) 1035.39,1067 ; v2(1035.39,1325) 1035.39,1067 ; v1(1427,1444) 1427,1129 v3(1365,1067) 1035.39,1067
  Bottom w15: 785,1067 v1(805,1067) ; C29.2@1009,1325 v2(1035.39,1325) ; C32.2@1184,795 v1(1184,820) ; v2(1327.5,1028) C35.2@1365,1028
  Bottom w30: C35.2@1365,1028 v3(1365,1067)
VDDIO: C37.2 C38.1 C39.1 R12.2 U1.14 U1.70 | length 1469.3
  Top w5: v1(1620,940) C39.1@1620,920 v1(1640,920)
  Top w9: 785,1104.37 U1.14@877.91,1104.37 ; U1.70@1492.09,899.65 1529.65,899.65 v1(1550,920)
  Top w15: v1(703,1110) 725.5,1132.5 777.5,1132.5 785,1125 785,1104.37 ; v1(1550,920) 1580,920
  Top w25: R12.2@673,1110 v1(703,1110)
  Inner Layer 3 w20: v1(703,1110) 703,1067 790,980 942,980 1144.5,777.5 1407.5,777.5 v1(1550,920)
  Bottom w20: C37.2@677,1110 v1(703,1110)
VDDIO_CSI0: C72.1 CON2.6 U1.98 | length 1097.9
  Top w8: U1.98@1413.35,1372.09 1413.35,1414 1421.35,1422 1452,1422 1465,1435 C72.1@1465,1465
  Top w15: C72.1@1465,1465 v1(1490,1465)
  Inner Layer 3 w9: v1(1490,1465) 1670,1465 1925.65,1209.35 1925.65,907.5 v1(1965,868.15)
  Bottom w9: CON2.6@1923.38,868.15 v1(1965,868.15)
VDDIO_OSC: C57.1 C58.1 FB7.2 U1.24 | length 209.5
  Top w9: FB7.2@756.5,842.5 756.5,881.5 C58.1@767.5,892.5 C57.1@767.5,930 810,930 826.89,946.89 U1.24@877.91,946.89
VIN1: C42.1 C43.1 R13.1 U1.68 | length 200
  Top w5: R13.1@1571,740.5 C43.1@1571,800 C42.1@1571,850 C42.1@1571,847.15
  Top w9: U1.68@1492.09,868.15 1550,868.15 C42.1@1571,847.15
VREF_DDR: C62.2 C64.1 R14.1 R16.2 U1.51 | length 233.9
  Top w8: U1.51@1224.37,757.91 1224.37,813.37 v1(1236,825)
  Bottom w5: C62.2@1236,745 R14.1@1236,795 v1(1236,825) C64.1@1236,855
  Bottom w15: R16.2@1184,745 C62.2@1236,745
WIFI_EN: CON3.42 U1.9 | length 778.5
  Top w5: v1(407,907.52) 380,934.52 380,1045 442.5,1107.5 442.5,1167.5 458.11,1183.11 U1.9@877.91,1183.11
  Bottom w5: v1(407,907.52) CON3.42@446.62,907.52
WIFI_INT: CON3.41 U1.7 | length 901.7
  Top w5: v1(345,907.52) 317.5,935.02 317.5,1185 347.11,1214.61 U1.7@877.91,1214.61
  Bottom w5: CON3.41@304.88,907.52 v1(345,907.52)
WIFI_RST: CON3.38 U1.10 | length 712.4
  Top w5: v1(407.5,946.89) 390,964.39 390,1040 452.5,1102.5 452.5,1157.5 462.36,1167.36 U1.10@877.91,1167.36
  Bottom w5: v1(407.5,946.89) CON3.38@446.62,946.89
XCLK24M_XI: C67.1 U1.22 X2.1 | length 284.2
  Top w5: C67.1@650,1040 669.74,1040 677.24,1032.5 X2.1@677.24,995.43 705.17,967.5 802.5,967.5 813.39,978.39 U1.22@877.91,978.39
XCLK24M_XO: C63.1 U1.23 X2.3 | length 378.3
  Top w5: C63.1@610,880 590.26,880 582.76,887.5 X2.3@582.76,924.57 615.69,957.5 809.86,957.5 815,962.64 U1.23@877.91,962.64
XCLK32K_XI: C68.1 U1.64 X1.1 | length 214.3
  Top w5: U1.64@1429.09,757.91 1429.09,705.91 1459.5,675.5 1505.5,675.5 C68.1@1526,655 1530.98,650.02 X1.1@1530.98,612.72
XCLK32K_XO: R37.2 U1.63 | length 144.5
  Top w5: U1.63@1413.35,757.91 1413.35,706.65 1413.35,700.65 R37.2@1475,639
pads on no net: CON1.5 CON1.7 CON1.11 CON1.13 CON1.15 CON1.19 CON1.21 CON1.25 CON1.27 CON1.31 CON1.33 CON1.37 CON1.41 CON1.42 CON1.43 CON1.44 CON2.1 CON2.9 CON2.51 CON2.52 CON2.53 CON2.54 CON3.1 CON3.2 CON3.3 CON3.4 CON3.7 CON3.8 CON3.9 CON3.10 CON3.11 CON3.12 CON3.13 CON3.14 CON3.15 CON3.16 CON3.17 CON3.18 CON3.19 CON3.20 CON3.21 CON3.22 CON3.23 CON3.24 CON3.25 CON3.26 CON3.27 CON3.28 CON3.29 CON3.30 CON3.51 CON3.52 CON3.53 CON3.54 CON4.41 CON4.42 CON4.43 CON4.44 M3.1 M4.1 M6.1 M7.1 U1.66 U1.67
copper on no net: | length 32.5
  Inner Layer 3 w6: 1077.89,164.66 1084.12,164.66 ; 1099.57,131.57 1112.13,144.13 1112.13,152.61

## Polygon pours and split planes (outlines as drawn)
GND on Bottom "Bottom-GND" (solid, remove dead copper, pour order 3): 215,75 214.99,75.04 215.86,70.18 217.06,65.39 218.6,60.7 220.45,56.13 222.62,51.69 225.1,47.42 227.87,43.34 230.91,39.45 234.22,35.79 237.78,32.37 241.56,29.2 245.56,26.31 249.75,23.7 254.11,21.39 258.63,19.39 263.27,17.71 268.01,16.36 272.84,15.34 274.91,15.01 2090,15 2089.97,15 2094.74,15.41 2099.47,16.15 2104.14,17.22 2108.72,18.61 2113.19,20.32 2117.53,22.33 2121.72,24.65 2125.74,27.25 2129.57,30.12 2133.19,33.26 2136.58,36.63 2139.73,40.24 2142.62,44.06 2145.23,48.07 2147.56,52.25 2149.59,56.59 2151.31,61.06 2152.72,65.63 2153.81,70.3 2154.56,75.02 2154.99,79.79 2155,80.03 2155,2040 2155,2039.94 2154.7,2045.28 2154.03,2050.59 2152.99,2055.84 2151.59,2061.01 2149.83,2066.06 2147.72,2070.98 2145.27,2075.74 2142.5,2080.32 2139.42,2084.7 2136.03,2088.84 2132.37,2092.75 2128.44,2096.38 2124.27,2099.74 2119.87,2102.79 2115.28,2105.53 2110.5,2107.95 2105.56,2110.02 2100.5,2111.75 2095.32,2113.11 2090.07,2114.12 2084.75,2114.75 2080.07,2115 290,2115 289.94,2115 284.47,2114.56 279.05,2113.74 273.69,2112.54 268.44,2110.97 263.3,2109.04 258.32,2106.76 253.5,2104.14 248.88,2101.18 244.48,2097.91 240.31,2094.34 236.41,2090.49 232.78,2086.38 229.45,2082.02 226.43,2077.44 223.74,2072.66 221.38,2067.71 219.38,2062.6 217.74,2057.37 216.47,2052.03 215.58,2046.62 215.06,2041.16 215,2039.93
AGND on Bottom "Bottom-AGND" (solid, remove dead copper, pour order 0): 1445,2100 1445,1615 2140,1615 2140,2050 2090,2100
GND on Top "Top-GND" (solid, remove dead copper, pour order 5): 215,75 215.01,74.94 215.79,70.17 216.9,65.46 218.34,60.84 220.1,56.34 222.16,51.96 224.53,47.74 227.19,43.7 230.12,39.85 233.31,36.22 236.75,32.82 240.42,29.66 244.3,26.77 248.37,24.16 252.61,21.84 257,19.81 261.53,18.1 266.16,16.71 270.88,15.65 275.06,14.99 2090,15 2089.98,15 2094.68,15.34 2099.35,16 2103.96,16.99 2108.49,18.3 2112.91,19.92 2117.22,21.84 2121.38,24.06 2125.37,26.57 2129.18,29.35 2132.78,32.38 2136.17,35.66 2139.32,39.17 2142.22,42.89 2144.84,46.81 2147.2,50.89 2149.25,55.13 2151.01,59.51 2152.46,64 2153.59,68.57 2154.41,73.22 2154.89,77.91 2155,80.02 2155,2040 2154.99,2040.04 2153.98,2046.05 2152.55,2051.97 2150.71,2057.77 2148.46,2063.43 2145.83,2068.93 2142.82,2074.22 2139.45,2079.3 2135.74,2084.12 2131.69,2088.68 2127.34,2092.94 2122.7,2096.89 2117.8,2100.5 2112.66,2103.76 2107.3,2106.66 2101.75,2109.18 2096.04,2111.3 2090.2,2113.02 2084.25,2114.33 2079.89,2115.01 290,2115 290.02,2115 284.21,2114.21 278.48,2113.01 272.84,2111.41 267.33,2109.43 261.97,2107.07 256.79,2104.33 251.81,2101.25 247.06,2097.82 242.56,2094.07 238.33,2090.01 234.39,2085.67 230.77,2081.07 227.48,2076.23 224.53,2071.16 221.94,2065.91 219.73,2060.48 217.9,2054.92 216.46,2049.24 215.43,2043.47 215,2039.98
AGND on Top "Top-AGND" (solid, remove dead copper, pour order 1): 1445,2100 1445,1615 2140,1615 2140,2050 2090,2100
GND on Inner Layer 2 "Inner Layer 2-GND" (solid, remove dead copper, pour order 6): 215,75 215,75.02 215.11,70.87 215.51,66.73 216.19,62.64 217.16,58.6 218.41,54.64 219.93,50.77 221.72,47.03 223.77,43.41 226.06,39.95 228.59,36.65 231.34,33.54 234.3,30.63 237.46,27.93 240.8,25.46 244.3,23.23 247.95,21.25 251.73,19.53 255.62,18.07 259.6,16.89 263.66,15.99 267.76,15.38 271.9,15.05 275.02,15 2090,15 2089.97,15 2094.74,15.41 2099.47,16.15 2104.14,17.22 2108.72,18.61 2113.19,20.32 2117.53,22.33 2121.72,24.65 2125.74,27.25 2129.57,30.12 2133.19,33.26 2136.58,36.63 2139.73,40.24 2142.62,44.06 2145.23,48.07 2147.56,52.25 2149.59,56.59 2151.31,61.06 2152.72,65.63 2153.81,70.3 2154.56,75.02 2154.99,79.79 2155,79.91 2155,2040 2155.01,2039.95 2153.92,2046.03 2152.42,2052.01 2150.5,2057.88 2148.18,2063.59 2145.47,2069.13 2142.38,2074.47 2138.92,2079.58 2135.11,2084.43 2130.97,2089.01 2126.53,2093.29 2121.8,2097.25 2116.8,2100.86 2111.56,2104.12 2106.11,2107.01 2100.47,2109.51 2094.67,2111.61 2088.73,2113.3 2082.7,2114.57 2080.11,2114.98 290,2115 289.94,2115 284.47,2114.56 279.05,2113.74 273.69,2112.54 268.44,2110.97 263.3,2109.04 258.32,2106.76 253.5,2104.14 248.88,2101.18 244.48,2097.91 240.31,2094.34 236.41,2090.49 232.78,2086.38 229.45,2082.02 226.43,2077.44 223.74,2072.66 221.38,2067.71 219.38,2062.6 217.74,2057.37 216.47,2052.03 215.58,2046.62 215.06,2041.16 215,2039.93
AGND on Inner Layer 2 "Inner Layer 2-AGND" (solid, remove dead copper, pour order 2): 1445,2100 1445,1615 2140,1615 2140,2050 2090,2100
AGND on Inner Layer 3 "Inner Layer 3-AGND" (solid, remove dead copper, pour order 7): 1445,2100 1445,1615 2140,1615 2140,2050 2090,2100
VDD_3V3 on Inner Layer 3 "Inner Layer 3-VDD_3V3" (solid, remove dead copper, pour order 4): 290,2100 230,2040 230,70 270,30 2090,30 2140,80 2140,2050 2090,2100

## Keep-outs
Top:
  region: 915,1320 840,1320 840,810 915,810 915,1320
  region: 1710,940 1770,940 1770,830 1710,830 1710,940
  region: 1435,795 935,795 930,790 930,720 1440,720 1440,790 1435,795
  region: 1527.5,1320 1455,1320 1455,810 1527.5,810 1527.5,1320
  region: 1440,1410 930,1410 930,1335 1440,1335 1440,1410
Bottom:
  region: 1715,310 1825,310 1825,370 1715,370 1715,310
  region: 1835,440 1707.5,440 1707.5,400 1835,400 1835,440
  region: 1940,1975 2025,1975 2025,1810 1940,1810 1940,1975
  region: 1740,542.5 1740,432.5 1800,432.5 1800,542.5 1740,542.5
Keep-Out Layer:
  lines w8: 200,70 200,2040 cw(c293.93,2036.07) 289.99,2130 2095,2130 cw(c2095,2055) 2170,2055 2170,75 ; 200,69.96 ccw(c275.5,75.5) 270.09,-0.01 ; 270,0 2095,0 ; 2094.94,0 ccw(c2093.33,76.67) 2170,74.93

## Other copper
Top:
  region net VDD_1V8: 1170,720 1165,715 1165,642.5 1262.5,642.5 1262.5,702.5 1245,720 1170,720
  region net VDD_1V1: 1755,940 1810,940 1810,680 1755,680 1755,940
  region net VDD_3V3: 1850,910 1897.5,910 1897.5,850 1850,850 1850,910
  region net SW11: 1540,885 1555,900 1675,900 1675,940 1710,940 1710,830 1675,830 1675,880 1540,880 1540,885
  region net VIN1: 1525,870 1590,870 1590,720 1555,720 1555,840 1525,870
  region net VDD_1V8: 1244,720 1244,700 1172,700 1172,720 1244,720
  region net AGND: 1440,1680 1290,1680 1290,1725 1298,1733 1328,1733 1337.5,1742.5 1337.5,1892.5 1320,1910 1320,1935 1325,1940 1380,1940 1385,1935 1385,1880 1395,1870 1440,1870 1440,1680
Inner Layer 2:
  region net VDD_3V3: 1850,910 1897.5,910 1897.5,885 1850,885 1850,910
Inner Layer 3:
  region net VDD_3V3: 1850,910 1897.5,910 1897.5,885 1850,885 1850,910
  region net VDD_CPU: 1035,1105 1000,1070 1070,1070 1035,1105
Bottom:
  region net VDD_1V8: 1252,721 1167,721 1167,612.5 1252,612.5 1252,721
  region net VDD_1V1: 1763,767 1810,767 1810,643 1763,643 1763,767
  region net DDR: 1661,360 1692,360 1692,280 1661,280 1661,360
  region net DDR: 1815,310 1661,310 1661,280 1815,280 1815,310
  region net AVCC33_MIPI_DSI: 1270,1460 1270,1425 1285,1425 1285,1460 1270,1460
  region net AGND: 1260,1750 1260,1565 1290,1565 1290,1500 1265,1500 1265,1480 1320,1480 1320,1732.5 1317.5,1735 1305,1735 1300,1740 1300,1755 1315,1770 1335,1770 1340,1775 1340,1800 1310,1800 1260,1750
  region net VREF_DDR: 1225,870 1246,870 1246,731 1225,731 1225,870
  region net NETC9_1: 1680,150 1775,150 1775,115 1680,115 1680,150
  region net VDD_3V3: 1850,913.5 1850,882 1955,882 1955,913.5 1850,913.5
  region net AVCC33_MIPI_DSI: 1265,1460 1375,1460 1375,1440 1265,1440 1265,1460
  region net VDD_CPU: 1350,1042 1450,1042 1450,1013 1350,1013 1350,1042
  region net VCC_3V6: 1955,854.25 1889.25,854.25 1865,830 1865,690 1895,660 1995,660 2010,645 2010,535 1960,535 1960,510 2010,510 2010,390 1965,390 1965,365 2040,365 2040,670 2010,700 1920,700 1900,720 1900,810 1910,820 1955,820 1955,854.25
  region net VDD_1V8: 1167,633 1200,633 1200,555 1167,555 1167,633
Multi-Layer:
  lines w8: -150,2130 245,2130 ; 200,2200 200,4170 cw(c293.93,4166.07) 289.99,4260 2095,4260 cw(c2095,4185) 2170,4185 2170,2205 ; 200,2199.96 ccw(c275.5,2205.5) 270.09,2129.99 ; 270,2130 2095,2130 ; 2094.94,2130 ccw(c2093.33,2206.67) 2170,2204.93 ; 2170,70 2170,2040 cw(c2263.93,2036.07) 2259.99,2130 4065,2130 ; 2170,2200 2170,4170 cw(c2263.93,4166.07) 2259.99,4260 4065,4260 cw(c4065,4185) 4140,4185 4140,2205 ; 2170,69.96 ccw(c2245.5,75.5) 2240.09,-0.01 ; 2170,2199.96 ccw(c2245.5,2205.5) 2240.09,2129.99 ; 2240,0 4065,0 ; 2240,2130 4065,2130 ; 4064.94,0 ccw(c4063.33,76.67) 4140,74.93 ; 4064.94,2130 ccw(c4063.33,2206.67) 4140,2204.93 ; 4100,2130 4435,2130 ; 4140,75 4140,2055 ccw(c4065,2055) 4065,2130 ; 0,0 200,0 200,4260 0,4260 0,0 ; 4140,0 4340,0 4340,4260 4140,4260 4140,0

## Silkscreen, mask and mechanical layers (free items; w line width, h text height)
Silkscreen Top:
  region: 415.16,1975 ccw(c335,1975) 335,2055.16 ccw(c335,1975) 254.84,1975 ccw(c335,1975) 335,1894.84 ccw(c335,1975)
  text "EVB_CBDM_AK3760E_V1.0.1" at 835,37.5 h15
  text "PBA37E6B2XX 2020/12/14" at 1210,35 h15